# EAGLE board ARTIC_R2_Module_Breakout-Panel (EAGLE 9.6.2), part 1 of 2
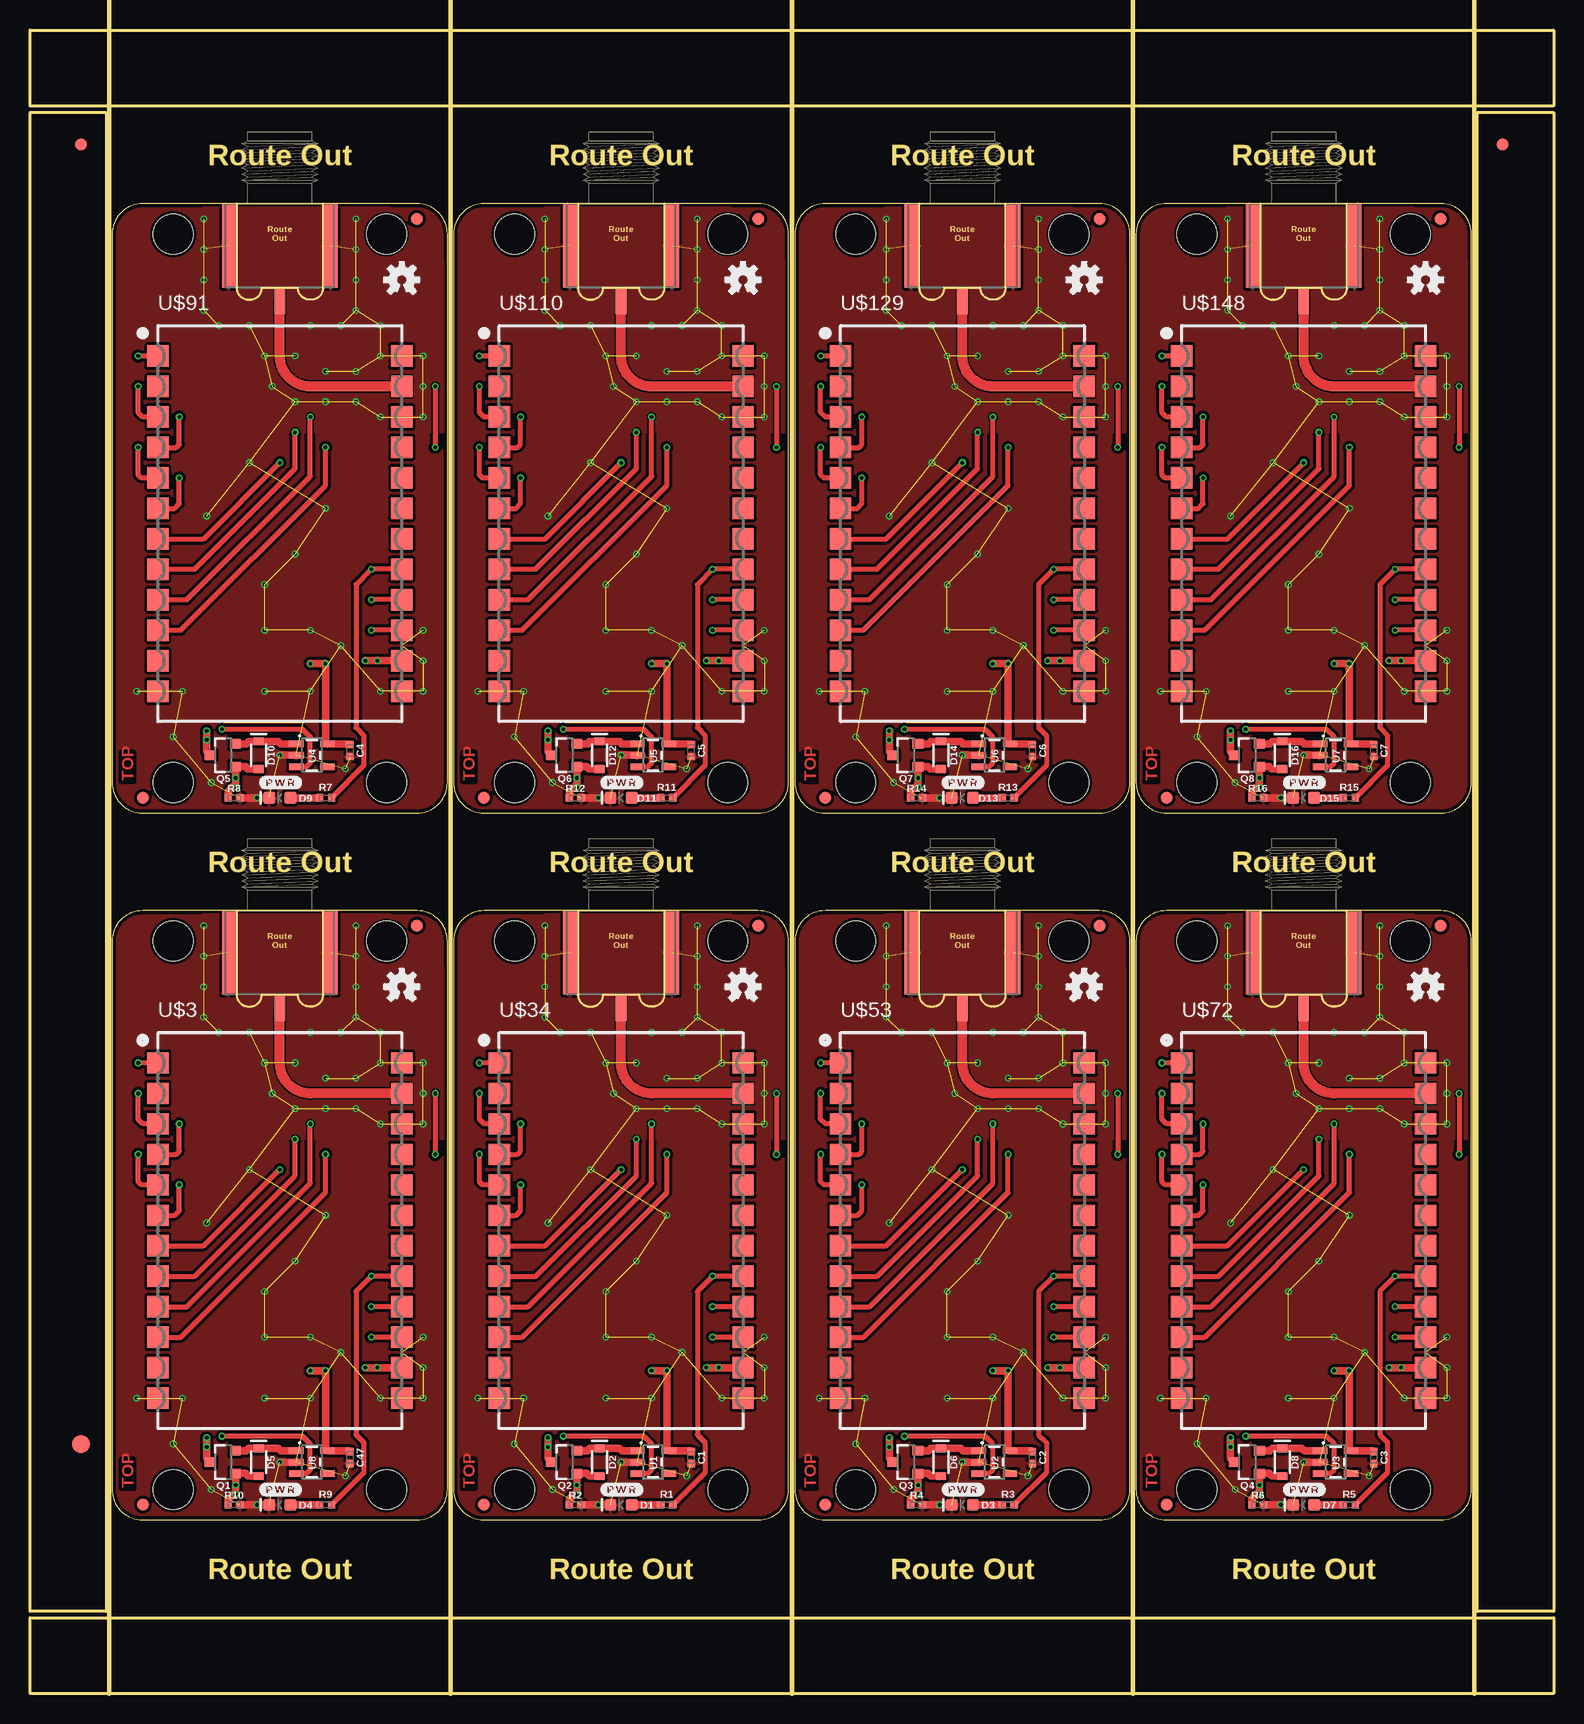
[diagram p0: board, top side]
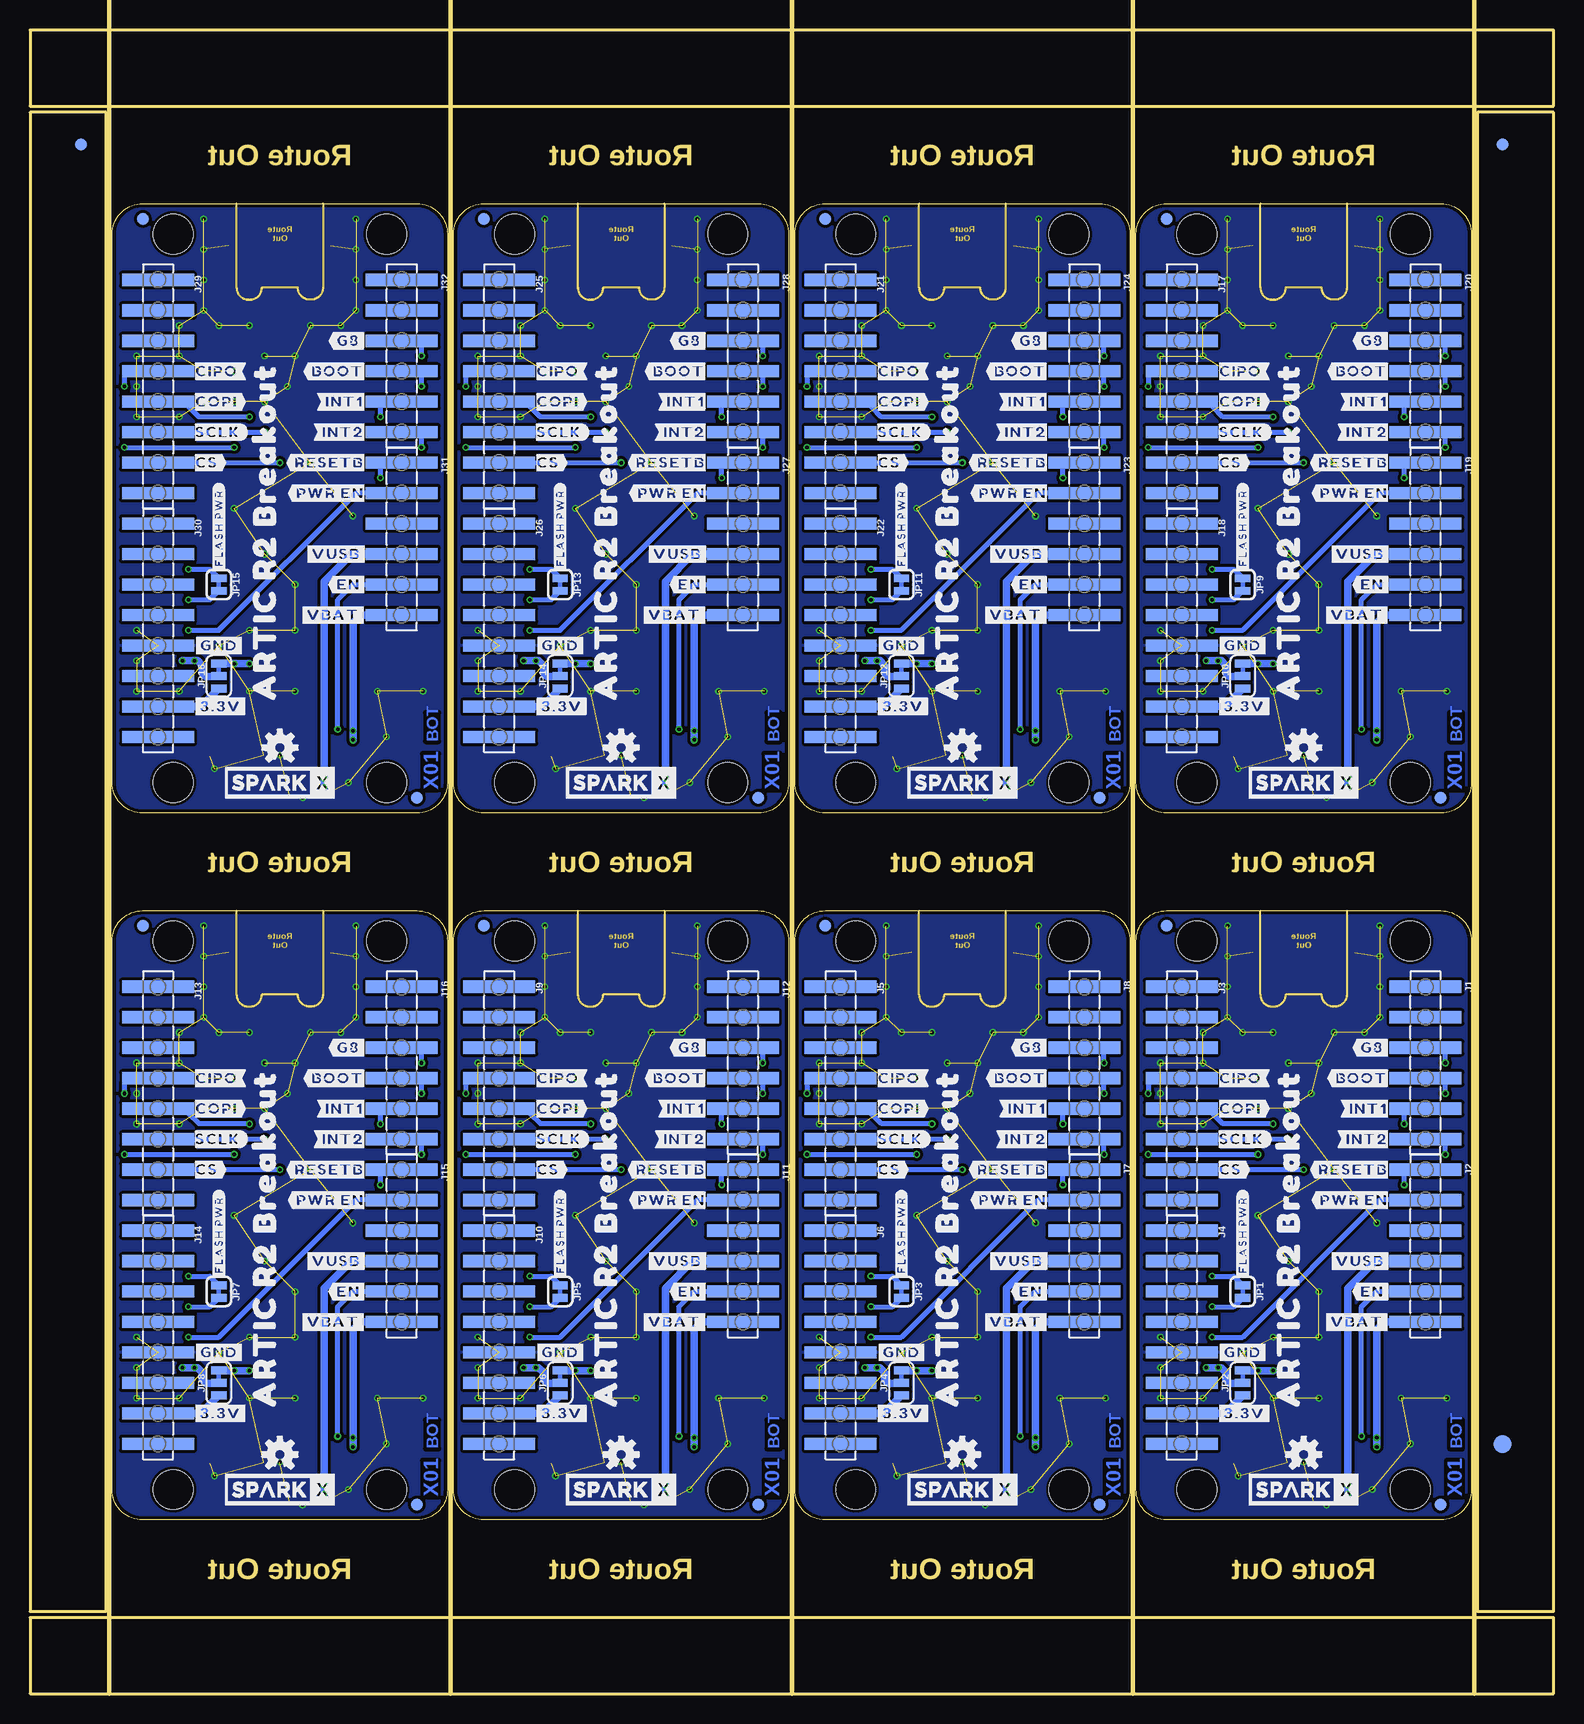
[diagram p1: board, bottom side, seen from below]

Size 127 x 138.68 mm. Coordinates in mm from the lower left corner, seen from the top.
Outline: 6.86,62.74 6.86,17.02 arc90 9.4,14.48 32.26,14.48 arc90 34.8,17.02 34.8,62.74 arc90 32.26,65.28 9.4,65.28 arc90 6.86,62.74
Outline: 35.31,62.74 35.31,17.02 arc90 37.85,14.48 60.71,14.48 arc90 63.25,17.02 63.25,62.74 arc90 60.71,65.28 37.85,65.28 arc90 35.31,62.74
Outline: 63.75,62.74 63.75,17.02 arc90 66.29,14.48 89.15,14.48 arc90 91.69,17.02 91.69,62.74 arc90 89.15,65.28 66.29,65.28 arc90 63.75,62.74
Outline: 92.2,62.74 92.2,17.02 arc90 94.74,14.48 117.6,14.48 arc90 120.14,17.02 120.14,62.74 arc90 117.6,65.28 94.74,65.28 arc90 92.2,62.74
Outline: 6.86,121.67 6.86,75.95 arc90 9.4,73.41 32.26,73.41 arc90 34.8,75.95 34.8,121.67 arc90 32.26,124.21 9.4,124.21 arc90 6.86,121.67
Outline: 35.31,121.67 35.31,75.95 arc90 37.85,73.41 60.71,73.41 arc90 63.25,75.95 63.25,121.67 arc90 60.71,124.21 37.85,124.21 arc90 35.31,121.67
Outline: 63.75,121.67 63.75,75.95 arc90 66.29,73.41 89.15,73.41 arc90 91.69,75.95 91.69,121.67 arc90 89.15,124.21 66.29,124.21 arc90 63.75,121.67
Outline: 92.2,121.67 92.2,75.95 arc90 94.74,73.41 117.6,73.41 arc90 120.14,75.95 120.14,121.67 arc90 117.6,124.21 94.74,124.21 arc90 92.2,121.67
Outline: 0,6.35 127,6.35 127,0 0,0 0,6.35
Outline: 120.65,131.83 127,131.83 127,6.86 120.65,6.86 120.65,131.83
Outline: 0,138.68 127,138.68 127,132.33 0,132.33 0,138.68
Outline: 0,131.83 6.35,131.83 6.35,6.86 0,6.86 0,131.83
Copper layers (1+2*15+16): Top 0.035mm / dielectric 0.2mm / Route2 0.0175mm / dielectric 1.065mm / Route15 0.0175mm / dielectric 0.2mm / Bottom 0.035mm
Design rules "ARTIC_R2_Module_Breakout": minimum track width 5mil, minimum drill 0.2mm, track to track 5mil, track to pad 0.2mm, pad to pad 5mil, via to via 0.2mm, smd to smd 0mil, copper to edge 0.2mm, drill to drill 10mil, minimum pad ring 0.13mm, minimum via ring 0.13mm, stop-mask expansion 0.05mm, vias tented up to drill 25mil, thermal gap 10mil
Holes 3.3 mm at 11.94,17.02 29.72,17.02 29.72,62.74 11.94,62.74 40.39,17.02 58.17,17.02 58.17,62.74 40.39,62.74 68.83,17.02 86.61,17.02 86.61,62.74 68.83,62.74 97.28,17.02 115.06,17.02 115.06,62.74 97.28,62.74 11.94,75.95 29.72,75.95 29.72,121.67 11.94,121.67 40.39,75.95 58.17,75.95 58.17,121.67 40.39,121.67 68.83,75.95 86.61,75.95 86.61,121.67 68.83,121.67 97.28,75.95 115.06,75.95 115.06,121.67 97.28,121.67
Milling: 5 lines

## Footprints (pad centres in the part's own frame; a part is rotated, then mirrored left to right if it is on the bottom)
0402-TIGHT = smd 0.6 x 0.6: 1 -0.5,0; 2 0.5,0
LED-0603 = smd 1 x 1: A -0.877,0; C 0.877,0
SOD-323 = smd 0.63 x 0.83: A 1.15,0; C -1.15,0
SMA-EDGE-SMD = smd 1.15 x 7: GND@0 -4.25,-3.5; GND@1 4.25,-3.5 | smd 0.9 x 2.2: SIG 0,-8.1
FIDUCIAL-1X2 = smd 1 x 1: 1 0,0
FIDUCIAL-1.5X3 = smd 1.5 x 1.5: 1 0,0
1X06_SMD_MALE = smd 1.02 x 6: 1 0,0; 2 2.54,0; 3 5.08,0; 4 7.62,0; 5 10.16,0; 6 12.7,0
1X08_SMD_MALE = smd 1.02 x 6: 1 0,0; 2 2.54,0; 3 5.08,0; 4 7.62,0; 5 10.16,0; 6 12.7,0; 7 15.24,0; 8 17.78,0
SMT-JUMPER_2_NC_TRACE_SILK = smd 0.66 x 1.27: 1 -0.521,0; 2 0.521,0
SMT-JUMPER_3_1-NC_TRACE_SILK = smd 0.66 x 1.27: 1 -1.041,0; 2 0,0; 3 1.041,0
SOT23-3 = smd 0.8 x 0.9: 1 -0.95,-1; 2 0.95,-1; 3 0,1.1
SOT23-5 = smd 0.55 x 1.2: 1 -0.95,-1.3; 2 0,-1.3; 3 0.95,-1.3; 4 0.95,1.3; 5 -0.95,1.3
ARTIC_R2_MODULE = smd 1.778 x 1.778: 1 -10.16,13.97; 2 -10.16,11.43; 3 -10.16,8.89; 4 -10.16,6.35; 5 -10.16,3.81; 6 -10.16,1.27; 7 -10.16,-1.27; 8 -10.16,-3.81; 9 -10.16,-6.35; 10 -10.16,-8.89; 11 -10.16,-11.43; 12 -10.16,-13.97; 13 10.16,-13.97; 14 10.16,-11.43; 15 10.16,-8.89; 16 10.16,-6.35; 17 10.16,-3.81; 18 10.16,-1.27; 19 10.16,1.27; 20 10.16,3.81; 21 10.16,6.35; 22 10.16,8.89; 23 10.16,11.43; 24 10.16,13.97

## Placement (x,y rotation side)
C1  2.2uF  [0402-TIGHT]  55.12,19.68 270 top
C2  2.2uF  [0402-TIGHT]  83.57,19.68 270 top
C3  2.2uF  [0402-TIGHT]  112.01,19.68 270 top
C4  2.2uF  [0402-TIGHT]  26.67,78.61 270 top
C5  2.2uF  [0402-TIGHT]  55.12,78.61 270 top
C6  2.2uF  [0402-TIGHT]  83.57,78.61 270 top
C7  2.2uF  [0402-TIGHT]  112.01,78.61 270 top
C47  2.2uF  [0402-TIGHT]  26.67,19.68 270 top
D1  RED  [LED-0603]  49.28,15.75 180 top
D2  1A/23V/620mV  [SOD-323]  47.5,19.3 270 top
D3  RED  [LED-0603]  77.72,15.75 180 top
D4  RED  [LED-0603]  20.83,15.75 180 top
D5  1A/23V/620mV  [SOD-323]  19.05,19.3 270 top
D6  1A/23V/620mV  [SOD-323]  75.95,19.3 270 top
D7  RED  [LED-0603]  106.17,15.75 180 top
D8  1A/23V/620mV  [SOD-323]  104.39,19.3 270 top
D9  RED  [LED-0603]  20.83,74.68 180 top
D10  1A/23V/620mV  [SOD-323]  19.05,78.23 270 top
D11  RED  [LED-0603]  49.28,74.68 180 top
D12  1A/23V/620mV  [SOD-323]  47.5,78.23 270 top
D13  RED  [LED-0603]  77.72,74.68 180 top
D14  1A/23V/620mV  [SOD-323]  75.95,78.23 270 top
D15  RED  [LED-0603]  106.17,74.68 180 top
D16  1A/23V/620mV  [SOD-323]  104.39,78.23 270 top
E1  ANTENNA-SMA-GROUNDEDEDGE_SMA_SMD  [SMA-EDGE-SMD]  20.83,65.28 0 top
E2  ANTENNA-SMA-GROUNDEDEDGE_SMA_SMD  [SMA-EDGE-SMD]  49.28,65.28 0 top
E3  ANTENNA-SMA-GROUNDEDEDGE_SMA_SMD  [SMA-EDGE-SMD]  77.72,65.28 0 top
E4  ANTENNA-SMA-GROUNDEDEDGE_SMA_SMD  [SMA-EDGE-SMD]  106.17,65.28 0 top
E5  ANTENNA-SMA-GROUNDEDEDGE_SMA_SMD  [SMA-EDGE-SMD]  20.83,124.21 0 top
E6  ANTENNA-SMA-GROUNDEDEDGE_SMA_SMD  [SMA-EDGE-SMD]  49.28,124.21 0 top
E7  ANTENNA-SMA-GROUNDEDEDGE_SMA_SMD  [SMA-EDGE-SMD]  77.72,124.21 0 top
E8  ANTENNA-SMA-GROUNDEDEDGE_SMA_SMD  [SMA-EDGE-SMD]  106.17,124.21 0 top
E$1  [FIDUCIAL-1X2]  4.23,129.16 0 top
E$2  [FIDUCIAL-1X2]  4.23,129.16 0 bottom
E$3  [FIDUCIAL-1X2]  122.77,129.16 0 top
E$4  [FIDUCIAL-1X2]  122.77,129.16 0 bottom
E$5  [FIDUCIAL-1.5X3]  4.23,20.83 0 top
E$6  [FIDUCIAL-1.5X3]  4.23,20.83 0 bottom
FD1  FIDUCIAL1X2  [FIDUCIAL-1X2]  32.26,64.01 0 top
FD2  FIDUCIAL1X2  [FIDUCIAL-1X2]  32.26,64.01 0 bottom
FD3  FIDUCIAL1X2  [FIDUCIAL-1X2]  9.4,15.75 0 top
FD4  FIDUCIAL1X2  [FIDUCIAL-1X2]  9.4,15.75 0 bottom
FD5  FIDUCIAL1X2  [FIDUCIAL-1X2]  60.71,64.01 0 top
FD6  FIDUCIAL1X2  [FIDUCIAL-1X2]  60.71,64.01 0 bottom
FD7  FIDUCIAL1X2  [FIDUCIAL-1X2]  37.85,15.75 0 top
FD8  FIDUCIAL1X2  [FIDUCIAL-1X2]  37.85,15.75 0 bottom
FD9  FIDUCIAL1X2  [FIDUCIAL-1X2]  89.15,64.01 0 top
FD10  FIDUCIAL1X2  [FIDUCIAL-1X2]  89.15,64.01 0 bottom
FD11  FIDUCIAL1X2  [FIDUCIAL-1X2]  66.29,15.75 0 top
FD12  FIDUCIAL1X2  [FIDUCIAL-1X2]  66.29,15.75 0 bottom
FD13  FIDUCIAL1X2  [FIDUCIAL-1X2]  117.6,64.01 0 top
FD14  FIDUCIAL1X2  [FIDUCIAL-1X2]  117.6,64.01 0 bottom
FD15  FIDUCIAL1X2  [FIDUCIAL-1X2]  94.74,15.75 0 top
FD16  FIDUCIAL1X2  [FIDUCIAL-1X2]  94.74,15.75 0 bottom
FD17  FIDUCIAL1X2  [FIDUCIAL-1X2]  32.26,122.94 0 top
FD18  FIDUCIAL1X2  [FIDUCIAL-1X2]  32.26,122.94 0 bottom
FD19  FIDUCIAL1X2  [FIDUCIAL-1X2]  9.4,74.68 0 top
FD20  FIDUCIAL1X2  [FIDUCIAL-1X2]  9.4,74.68 0 bottom
FD21  FIDUCIAL1X2  [FIDUCIAL-1X2]  60.71,122.94 0 top
FD22  FIDUCIAL1X2  [FIDUCIAL-1X2]  60.71,122.94 0 bottom
FD23  FIDUCIAL1X2  [FIDUCIAL-1X2]  37.85,74.68 0 top
FD24  FIDUCIAL1X2  [FIDUCIAL-1X2]  37.85,74.68 0 bottom
FD25  FIDUCIAL1X2  [FIDUCIAL-1X2]  89.15,122.94 0 top
FD26  FIDUCIAL1X2  [FIDUCIAL-1X2]  89.15,122.94 0 bottom
FD27  FIDUCIAL1X2  [FIDUCIAL-1X2]  66.29,74.68 0 top
FD28  FIDUCIAL1X2  [FIDUCIAL-1X2]  66.29,74.68 0 bottom
FD29  FIDUCIAL1X2  [FIDUCIAL-1X2]  117.6,122.94 0 top
FD30  FIDUCIAL1X2  [FIDUCIAL-1X2]  117.6,122.94 0 bottom
FD31  FIDUCIAL1X2  [FIDUCIAL-1X2]  94.74,74.68 0 top
FD32  FIDUCIAL1X2  [FIDUCIAL-1X2]  94.74,74.68 0 bottom
J1  [1X06_SMD_MALE]  10.67,58.93 270 bottom
J2  [1X06_SMD_MALE]  10.67,43.69 270 bottom
J3  [1X08_SMD_MALE]  30.99,58.93 270 bottom
J4  [1X08_SMD_MALE]  30.99,38.61 270 bottom
J5  [1X08_SMD_MALE]  59.44,58.93 270 bottom
J6  [1X08_SMD_MALE]  59.44,38.61 270 bottom
J7  [1X06_SMD_MALE]  39.12,43.69 270 bottom
J8  [1X06_SMD_MALE]  39.12,58.93 270 bottom
J9  [1X08_SMD_MALE]  87.88,58.93 270 bottom
J10  [1X08_SMD_MALE]  87.88,38.61 270 bottom
J11  [1X06_SMD_MALE]  67.56,43.69 270 bottom
J12  [1X06_SMD_MALE]  67.56,58.93 270 bottom
J13  [1X08_SMD_MALE]  116.33,58.93 270 bottom
J14  [1X08_SMD_MALE]  116.33,38.61 270 bottom
J15  [1X06_SMD_MALE]  96.01,43.69 270 bottom
J16  [1X06_SMD_MALE]  96.01,58.93 270 bottom
J17  [1X08_SMD_MALE]  30.99,117.86 270 bottom
J18  [1X08_SMD_MALE]  30.99,97.54 270 bottom
J19  [1X06_SMD_MALE]  10.67,102.62 270 bottom
J20  [1X06_SMD_MALE]  10.67,117.86 270 bottom
J21  [1X08_SMD_MALE]  59.44,117.86 270 bottom
J22  [1X08_SMD_MALE]  59.44,97.54 270 bottom
J23  [1X06_SMD_MALE]  39.12,102.62 270 bottom
J24  [1X06_SMD_MALE]  39.12,117.86 270 bottom
J25  [1X08_SMD_MALE]  87.88,117.86 270 bottom
J26  [1X08_SMD_MALE]  87.88,97.54 270 bottom
J27  [1X06_SMD_MALE]  67.56,102.62 270 bottom
J28  [1X06_SMD_MALE]  67.56,117.86 270 bottom
J29  [1X08_SMD_MALE]  116.33,117.86 270 bottom
J30  [1X08_SMD_MALE]  116.33,97.54 270 bottom
J31  [1X06_SMD_MALE]  96.01,102.62 270 bottom
J32  [1X06_SMD_MALE]  96.01,117.86 270 bottom
JP1  JUMPER-SMT_2_NC_TRACE_SILK  [SMT-JUMPER_2_NC_TRACE_SILK]  25.91,33.53 270 bottom
JP2  JUMPER-SMT_3_1-NC_TRACE_SILK  [SMT-JUMPER_3_1-NC_TRACE_SILK]  25.91,25.91 90 bottom
JP3  JUMPER-SMT_2_NC_TRACE_SILK  [SMT-JUMPER_2_NC_TRACE_SILK]  54.36,33.53 270 bottom
JP4  JUMPER-SMT_3_1-NC_TRACE_SILK  [SMT-JUMPER_3_1-NC_TRACE_SILK]  54.36,25.91 90 bottom
JP5  JUMPER-SMT_2_NC_TRACE_SILK  [SMT-JUMPER_2_NC_TRACE_SILK]  82.8,33.53 270 bottom
JP6  JUMPER-SMT_3_1-NC_TRACE_SILK  [SMT-JUMPER_3_1-NC_TRACE_SILK]  82.8,25.91 90 bottom
JP7  JUMPER-SMT_2_NC_TRACE_SILK  [SMT-JUMPER_2_NC_TRACE_SILK]  111.25,33.53 270 bottom
JP8  JUMPER-SMT_3_1-NC_TRACE_SILK  [SMT-JUMPER_3_1-NC_TRACE_SILK]  111.25,25.91 90 bottom
JP9  JUMPER-SMT_2_NC_TRACE_SILK  [SMT-JUMPER_2_NC_TRACE_SILK]  25.91,92.46 270 bottom
JP10  JUMPER-SMT_3_1-NC_TRACE_SILK  [SMT-JUMPER_3_1-NC_TRACE_SILK]  25.91,84.84 90 bottom
JP11  JUMPER-SMT_2_NC_TRACE_SILK  [SMT-JUMPER_2_NC_TRACE_SILK]  54.36,92.46 270 bottom
JP12  JUMPER-SMT_3_1-NC_TRACE_SILK  [SMT-JUMPER_3_1-NC_TRACE_SILK]  54.36,84.84 90 bottom
JP13  JUMPER-SMT_2_NC_TRACE_SILK  [SMT-JUMPER_2_NC_TRACE_SILK]  82.8,92.46 270 bottom
JP14  JUMPER-SMT_3_1-NC_TRACE_SILK  [SMT-JUMPER_3_1-NC_TRACE_SILK]  82.8,84.84 90 bottom
JP15  JUMPER-SMT_2_NC_TRACE_SILK  [SMT-JUMPER_2_NC_TRACE_SILK]  111.25,92.46 270 bottom
JP16  JUMPER-SMT_3_1-NC_TRACE_SILK  [SMT-JUMPER_3_1-NC_TRACE_SILK]  111.25,84.84 90 bottom
LOGO1  OSHW-LOGOS  [OSHW-LOGO-S]  59.44,58.93 0 top
LOGO2  OSHW-LOGOS  [OSHW-LOGO-S]  30.99,58.93 0 top
LOGO3  OSHW-LOGOS  [OSHW-LOGO-S]  20.83,19.94 0 bottom
LOGO4  OSHW-LOGOS  [OSHW-LOGO-S]  49.28,19.94 0 bottom
LOGO5  OSHW-LOGOS  [OSHW-LOGO-S]  87.88,58.93 0 top
LOGO6  OSHW-LOGOS  [OSHW-LOGO-S]  77.72,19.94 0 bottom
LOGO7  OSHW-LOGOS  [OSHW-LOGO-S]  116.33,58.93 0 top
LOGO8  OSHW-LOGOS  [OSHW-LOGO-S]  106.17,19.94 0 bottom
LOGO9  OSHW-LOGOS  [OSHW-LOGO-S]  30.99,117.86 0 top
LOGO10  OSHW-LOGOS  [OSHW-LOGO-S]  20.83,78.87 0 bottom
LOGO11  OSHW-LOGOS  [OSHW-LOGO-S]  59.44,117.86 0 top
LOGO12  OSHW-LOGOS  [OSHW-LOGO-S]  49.28,78.87 0 bottom
LOGO13  OSHW-LOGOS  [OSHW-LOGO-S]  87.88,117.86 0 top
LOGO14  OSHW-LOGOS  [OSHW-LOGO-S]  77.72,78.87 0 bottom
LOGO15  OSHW-LOGOS  [OSHW-LOGO-S]  116.33,117.86 0 top
LOGO16  OSHW-LOGOS  [OSHW-LOGO-S]  106.17,78.87 0 bottom
Q1  3.1A/30V/105mΩ  [SOT23-3]  16.13,19.3 90 top
Q2  3.1A/30V/105mΩ  [SOT23-3]  44.58,19.3 90 top
Q3  3.1A/30V/105mΩ  [SOT23-3]  73.03,19.3 90 top
Q4  3.1A/30V/105mΩ  [SOT23-3]  101.47,19.3 90 top
Q5  3.1A/30V/105mΩ  [SOT23-3]  16.13,78.23 90 top
Q6  3.1A/30V/105mΩ  [SOT23-3]  44.58,78.23 90 top
Q7  3.1A/30V/105mΩ  [SOT23-3]  73.03,78.23 90 top
Q8  3.1A/30V/105mΩ  [SOT23-3]  101.47,78.23 90 top
R1  1k  [0402-TIGHT]  53.09,15.75 0 top
R2  100k  [0402-TIGHT]  45.47,15.75 180 top
R3  1k  [0402-TIGHT]  81.53,15.75 0 top
R4  100k  [0402-TIGHT]  73.91,15.75 180 top
R5  1k  [0402-TIGHT]  109.98,15.75 0 top
R6  100k  [0402-TIGHT]  102.36,15.75 180 top
R7  1k  [0402-TIGHT]  24.64,74.68 0 top
R8  100k  [0402-TIGHT]  17.02,74.68 180 top
R9  1k  [0402-TIGHT]  24.64,15.75 0 top
R10  100k  [0402-TIGHT]  17.02,15.75 180 top
R11  1k  [0402-TIGHT]  53.09,74.68 0 top
R12  100k  [0402-TIGHT]  45.47,74.68 180 top
R13  1k  [0402-TIGHT]  81.53,74.68 0 top
R14  100k  [0402-TIGHT]  73.91,74.68 180 top
R15  1k  [0402-TIGHT]  109.98,74.68 0 top
R16  100k  [0402-TIGHT]  102.36,74.68 180 top
SPARKX1  SPARKX-LOGO4  [SPARKX-MEDIUM]  49.28,17.02 0 bottom
SPARKX2  SPARKX-LOGO4  [SPARKX-MEDIUM]  20.83,17.02 0 bottom
SPARKX3  SPARKX-LOGO4  [SPARKX-MEDIUM]  77.72,17.02 0 bottom
SPARKX4  SPARKX-LOGO4  [SPARKX-MEDIUM]  106.17,17.02 0 bottom
SPARKX5  SPARKX-LOGO4  [SPARKX-MEDIUM]  20.83,75.95 0 bottom
SPARKX6  SPARKX-LOGO4  [SPARKX-MEDIUM]  49.28,75.95 0 bottom
SPARKX7  SPARKX-LOGO4  [SPARKX-MEDIUM]  77.72,75.95 0 bottom
SPARKX8  SPARKX-LOGO4  [SPARKX-MEDIUM]  106.17,75.95 0 bottom
U1  3.3V  [SOT23-5]  51.94,19.3 270 top
U2  3.3V  [SOT23-5]  80.39,19.3 270 top
U3  3.3V  [SOT23-5]  108.84,19.3 270 top
U4  3.3V  [SOT23-5]  23.5,78.23 270 top
U5  3.3V  [SOT23-5]  51.94,78.23 270 top
U6  3.3V  [SOT23-5]  80.39,78.23 270 top
U7  3.3V  [SOT23-5]  108.84,78.23 270 top
U8  3.3V  [SOT23-5]  23.5,19.3 270 top
U$1  [#GND#0]  25.91,28.45 0 bottom
U$2  [#3#3V#0]  25.78,23.37 0 bottom
U$3  ARTIC_R2_MODULE  [ARTIC_R2_MODULE]  20.83,38.61 0 top
U$4  [#FLASH_PWR#0]  25.91,38.23 90 bottom
U$5  [#VBAT#0]  16.38,30.99 0 bottom
U$6  [#G8#0]  15.11,53.85 0 bottom
U$7  [#EN#0]  15.11,33.53 0 bottom
U$8  [#VUSB#0]  16.13,36.07 0 bottom
U$9  [CIPO#0]  26.1,51.31 0 bottom
U$10  [CIPO#0]  54.55,51.31 0 bottom
U$11  [COPI#0]  54.55,48.77 0 bottom
U$12  [COPI#0]  26.1,48.77 0 bottom
U$13  [SCLK#0]  54.48,46.23 0 bottom
U$14  [SCLK#0]  26.04,46.23 0 bottom
U$15  [CS#0]  55.37,43.69 0 bottom
U$16  [CS#0]  26.92,43.69 0 bottom
U$17  [#BOOT0]  44.45,51.31 0 bottom
U$18  [#RESETB0]  16.7,43.69 0 bottom
U$19  [#PWR_EN0]  16.64,41.15 0 bottom
U$20  [#RESETB0]  45.15,43.69 0 bottom
U$21  [#PWR_EN0]  45.08,41.15 0 bottom
U$22  [#INT20]  44.01,46.23 0 bottom
U$23  [#INT10]  43.88,48.77 0 bottom
U$24  [#BOOT0]  16,51.31 0 bottom
U$25  [#INT10]  15.43,48.77 0 bottom
U$26  [#INT20]  15.56,46.23 0 bottom
U$27  [#PWR#0]  49.34,17.02 0 top
U$28  [#PWR#0]  20.89,17.02 0 top
U$29  [ARTIC_R2_BREAKOUT0]  22.1,37.97 90 bottom
U$30  [ARTIC_R2_BREAKOUT0]  50.55,37.97 90 bottom
U$31  [#G8#0]  43.56,53.85 0 bottom
U$32  [#GND#0]  54.36,28.45 0 bottom
U$33  [#3#3V#0]  54.23,23.37 0 bottom
U$34  ARTIC_R2_MODULE  [ARTIC_R2_MODULE]  49.28,38.61 0 top
U$35  [#VBAT#0]  44.83,30.99 0 bottom
U$36  [#EN#0]  43.56,33.53 0 bottom
U$37  [#VUSB#0]  44.58,36.07 0 bottom
U$38  [#FLASH_PWR#0]  54.36,38.23 90 bottom
U$39  [CIPO#0]  82.99,51.31 0 bottom
U$40  [COPI#0]  82.99,48.77 0 bottom
U$41  [SCLK#0]  82.93,46.23 0 bottom
U$42  [CS#0]  83.82,43.69 0 bottom
U$43  [#BOOT0]  72.9,51.31 0 bottom
U$44  [#RESETB0]  73.6,43.69 0 bottom
U$45  [#PWR_EN0]  73.53,41.15 0 bottom
U$46  [#INT20]  72.45,46.23 0 bottom
U$47  [#INT10]  72.33,48.77 0 bottom
U$48  [#PWR#0]  77.79,17.02 0 top
U$49  [ARTIC_R2_BREAKOUT0]  78.99,37.97 90 bottom
U$50  [#G8#0]  72.01,53.85 0 bottom
U$51  [#GND#0]  82.8,28.45 0 bottom
U$52  [#3#3V#0]  82.68,23.37 0 bottom
U$53  ARTIC_R2_MODULE  [ARTIC_R2_MODULE]  77.72,38.61 0 top
U$54  [#VBAT#0]  73.28,30.99 0 bottom
U$55  [#EN#0]  72.01,33.53 0 bottom
U$56  [#VUSB#0]  73.03,36.07 0 bottom
U$57  [#FLASH_PWR#0]  82.8,38.23 90 bottom
U$58  [CIPO#0]  111.44,51.31 0 bottom
U$59  [COPI#0]  111.44,48.77 0 bottom
U$60  [SCLK#0]  111.38,46.23 0 bottom
U$61  [CS#0]  112.27,43.69 0 bottom
U$62  [#BOOT0]  101.35,51.31 0 bottom
U$63  [#RESETB0]  102.04,43.69 0 bottom
U$64  [#PWR_EN0]  101.98,41.15 0 bottom
U$65  [#INT20]  100.9,46.23 0 bottom
U$66  [#INT10]  100.77,48.77 0 bottom
U$67  [#PWR#0]  106.24,17.02 0 top
U$68  [ARTIC_R2_BREAKOUT0]  107.44,37.97 90 bottom
U$69  [#G8#0]  100.46,53.85 0 bottom
U$70  [#GND#0]  111.25,28.45 0 bottom
U$71  [#3#3V#0]  111.12,23.37 0 bottom
U$72  ARTIC_R2_MODULE  [ARTIC_R2_MODULE]  106.17,38.61 0 top
U$73  [#VBAT#0]  101.73,30.99 0 bottom
U$74  [#EN#0]  100.46,33.53 0 bottom
U$75  [#VUSB#0]  101.47,36.07 0 bottom
U$76  [#FLASH_PWR#0]  111.25,38.23 90 bottom
U$77  [CIPO#0]  26.1,110.24 0 bottom
U$78  [COPI#0]  26.1,107.7 0 bottom
U$79  [SCLK#0]  26.04,105.16 0 bottom
U$80  [CS#0]  26.92,102.62 0 bottom
U$81  [#BOOT0]  16,110.24 0 bottom
U$82  [#RESETB0]  16.7,102.62 0 bottom
U$83  [#PWR_EN0]  16.64,100.08 0 bottom
U$84  [#INT20]  15.56,105.16 0 bottom
U$85  [#INT10]  15.43,107.7 0 bottom
U$86  [#PWR#0]  20.89,75.95 0 top
U$87  [ARTIC_R2_BREAKOUT0]  22.1,96.9 90 bottom
U$88  [#G8#0]  15.11,112.78 0 bottom
U$89  [#GND#0]  25.91,87.38 0 bottom
U$90  [#3#3V#0]  25.78,82.3 0 bottom
U$91  ARTIC_R2_MODULE  [ARTIC_R2_MODULE]  20.83,97.54 0 top
U$92  [#VBAT#0]  16.38,89.92 0 bottom
U$93  [#EN#0]  15.11,92.46 0 bottom
U$94  [#VUSB#0]  16.13,95 0 bottom
U$95  [#FLASH_PWR#0]  25.91,97.16 90 bottom
U$96  [CIPO#0]  54.55,110.24 0 bottom
U$97  [COPI#0]  54.55,107.7 0 bottom
U$98  [SCLK#0]  54.48,105.16 0 bottom
U$99  [CS#0]  55.37,102.62 0 bottom
U$100  [#BOOT0]  44.45,110.24 0 bottom
U$101  [#RESETB0]  45.15,102.62 0 bottom
U$102  [#PWR_EN0]  45.08,100.08 0 bottom
U$103  [#INT20]  44.01,105.16 0 bottom
U$104  [#INT10]  43.88,107.7 0 bottom
U$105  [#PWR#0]  49.34,75.95 0 top
U$106  [ARTIC_R2_BREAKOUT0]  50.55,96.9 90 bottom
U$107  [#G8#0]  43.56,112.78 0 bottom
U$108  [#GND#0]  54.36,87.38 0 bottom
U$109  [#3#3V#0]  54.23,82.3 0 bottom
U$110  ARTIC_R2_MODULE  [ARTIC_R2_MODULE]  49.28,97.54 0 top
U$111  [#VBAT#0]  44.83,89.92 0 bottom
U$112  [#EN#0]  43.56,92.46 0 bottom
U$113  [#VUSB#0]  44.58,95 0 bottom
U$114  [#FLASH_PWR#0]  54.36,97.16 90 bottom
U$115  [CIPO#0]  82.99,110.24 0 bottom
U$116  [COPI#0]  82.99,107.7 0 bottom
U$117  [SCLK#0]  82.93,105.16 0 bottom
U$118  [CS#0]  83.82,102.62 0 bottom
U$119  [#BOOT0]  72.9,110.24 0 bottom
U$120  [#RESETB0]  73.6,102.62 0 bottom
U$121  [#PWR_EN0]  73.53,100.08 0 bottom
U$122  [#INT20]  72.45,105.16 0 bottom
U$123  [#INT10]  72.33,107.7 0 bottom
U$124  [#PWR#0]  77.79,75.95 0 top
U$125  [ARTIC_R2_BREAKOUT0]  78.99,96.9 90 bottom
U$126  [#G8#0]  72.01,112.78 0 bottom
U$127  [#GND#0]  82.8,87.38 0 bottom
U$128  [#3#3V#0]  82.68,82.3 0 bottom
U$129  ARTIC_R2_MODULE  [ARTIC_R2_MODULE]  77.72,97.54 0 top
U$130  [#VBAT#0]  73.28,89.92 0 bottom
U$131  [#EN#0]  72.01,92.46 0 bottom
U$132  [#VUSB#0]  73.03,95 0 bottom
U$133  [#FLASH_PWR#0]  82.8,97.16 90 bottom
U$134  [CIPO#0]  111.44,110.24 0 bottom
U$135  [COPI#0]  111.44,107.7 0 bottom
U$136  [SCLK#0]  111.38,105.16 0 bottom
U$137  [CS#0]  112.27,102.62 0 bottom
U$138  [#BOOT0]  101.35,110.24 0 bottom
U$139  [#RESETB0]  102.04,102.62 0 bottom
U$140  [#PWR_EN0]  101.98,100.08 0 bottom
U$141  [#INT20]  100.9,105.16 0 bottom
U$142  [#INT10]  100.77,107.7 0 bottom
U$143  [#PWR#0]  106.24,75.95 0 top
U$144  [ARTIC_R2_BREAKOUT0]  107.44,96.9 90 bottom
U$145  [#G8#0]  100.46,112.78 0 bottom
U$146  [#GND#0]  111.25,87.38 0 bottom
U$147  [#3#3V#0]  111.12,82.3 0 bottom
U$148  ARTIC_R2_MODULE  [ARTIC_R2_MODULE]  106.17,97.54 0 top
U$149  [#VBAT#0]  101.73,89.92 0 bottom
U$150  [#EN#0]  100.46,92.46 0 bottom
U$151  [#VUSB#0]  101.47,95 0 bottom
U$152  [#FLASH_PWR#0]  111.25,97.16 90 bottom

## Library data of the parts
C1-C7 C47 = SparkFun-Capacitors; PROD_ID: CAP-14232
D1 D3 D4 D7 D9 D11 D13 D15 = SparkFun-LED; PROD_ID: DIO-00819
D2 D5 D6 D8 D10 D12 D14 D16 = SparkFun-DiscreteSemi; PROD_ID: DIO-11623
E1-E8 = SparkFun-RF; PROD_ID: CONN-15100
E$1-E$4 FD1-FD32 LOGO1-LOGO16 = SparkFun-Aesthetics
E$5 E$6 = SparkFun-Retired
J1 J2 J7 J8 J11 J12 J15 J16 J19 J20 J23 J24 J27 J28 J31 J32 = Connectors; PROD_ID: PRT-11540
J3-J6 J9 J10 J13 J14 J17 J18 J21 J22 J25 J26 J29 J30 = Connectors; PROD_ID: PRT-11541
JP1-JP16 = SparkFun-Jumpers
Q1-Q8 = SparkFun-DiscreteSemi; PROD_ID: TRANS-11308
R1 R3 R5 R7 R9 R11 R13 R15 = SparkFun-Resistors; PROD_ID: RES-14342
R2 R4 R6 R8 R10 R12 R14 R16 = SparkFun-Resistors; PROD_ID: RES-13495
SPARKX1-SPARKX8 = SparkX
U1-U8 = SparkFun-IC-Power; PROD_ID: VREG-12457
U$1 U$2 U$4-U$33 U$35-U$52 U$54-U$71 U$73-U$90 U$92-U$109 U$111-U$128 U$130-U$147 U$149-U$152 = output
U$3 U$34 U$53 U$72 U$91 U$110 U$129 U$148 = ARTIC_R2_Module

## Nets
3.3V: JP2.2 U$3.14
3.3V1: JP4.2 U$34.14
3.3V2: JP6.2 U$53.14
3.3V3: JP8.2 U$72.14
3.3V4: JP10.2 U$91.14
3.3V5: JP12.2 U$110.14
3.3V6: JP14.2 U$129.14
3.3V7: JP16.2 U$148.14
3.3V_OUT: JP1.1 R9.2 U$3.17
3.3V_OUT1: JP3.1 R1.2 U$34.17
3.3V_OUT2: JP5.1 R3.2 U$53.17
3.3V_OUT3: JP7.1 R5.2 U$72.17
3.3V_OUT4: JP9.1 R7.2 U$91.17
3.3V_OUT5: JP11.1 R11.2 U$110.17
3.3V_OUT6: JP13.1 R13.2 U$129.17
3.3V_OUT7: JP15.1 R15.2 U$148.17
ANTENNA: E1.SIG U$3.23
ANTENNA1: E2.SIG U$34.23
ANTENNA2: E3.SIG U$53.23
ANTENNA3: E4.SIG U$72.23
ANTENNA4: E5.SIG U$91.23
ANTENNA5: E6.SIG U$110.23
ANTENNA6: E7.SIG U$129.23
ANTENNA7: E8.SIG U$148.23
BOOT: J1.4 U$3.3
BOOT1: J8.4 U$34.3
BOOT2: J12.4 U$53.3
BOOT3: J16.4 U$72.3
BOOT4: J20.4 U$91.3
BOOT5: J24.4 U$110.3
BOOT6: J28.4 U$129.3
BOOT7: J32.4 U$148.3
CIPO: J3.4 U$3.10
CIPO1: J5.4 U$34.10
CIPO2: J9.4 U$53.10
CIPO3: J13.4 U$72.10
CIPO4: J17.4 U$91.10
CIPO5: J21.4 U$110.10
CIPO6: J25.4 U$129.10
CIPO7: J29.4 U$148.10
COPI: J3.5 U$3.9
COPI1: J5.5 U$34.9
COPI2: J9.5 U$53.9
COPI3: J13.5 U$72.9
COPI4: J17.5 U$91.9
COPI5: J21.5 U$110.9
COPI6: J25.5 U$129.9
COPI7: J29.5 U$148.9
CS: J3.7 U$3.7
CS1: J5.7 U$34.7
CS2: J9.7 U$53.7
CS3: J13.7 U$72.7
CS4: J17.7 U$91.7
CS5: J21.7 U$110.7
CS6: J25.7 U$129.7
CS7: J29.7 U$148.7
EN: J2.5 U8.3
EN1: J7.5 U1.3
EN2: J11.5 U2.3
EN3: J15.5 U3.3
EN4: J19.5 U4.3
EN5: J23.5 U5.3
EN6: J27.5 U6.3
EN7: J31.5 U7.3
FLASH_PWR: JP1.2 U$3.16
FLASH_PWR1: JP3.2 U$34.16
FLASH_PWR2: JP5.2 U$53.16
FLASH_PWR3: JP7.2 U$72.16
FLASH_PWR4: JP9.2 U$91.16
FLASH_PWR5: JP11.2 U$110.16
FLASH_PWR6: JP13.2 U$129.16
FLASH_PWR7: JP15.2 U$148.16
G1: J8.3 U$34.1
G2: J12.3 U$53.1
G3: J16.3 U$72.1
G4: J20.3 U$91.1
G5: J24.3 U$110.1
G6: J28.3 U$129.1
G7: J32.3 U$148.1
G8: J1.3 U$3.1
GND: C47.2 D4.C E1.GND@0 E1.GND@1 J4.5 R10.1 U8.2 U$3.12 U$3.13 U$3.22 U$3.24
GND1: C1.2 D1.C E2.GND@0 E2.GND@1 J6.5 R2.1 U1.2 U$34.12 U$34.13 U$34.22 U$34.24
GND2: C2.2 D3.C E3.GND@0 E3.GND@1 J10.5 R4.1 U2.2 U$53.12 U$53.13 U$53.22 U$53.24
GND3: C3.2 D7.C E4.GND@0 E4.GND@1 J14.5 R6.1 U3.2 U$72.12 U$72.13 U$72.22 U$72.24
GND4: C4.2 D9.C E5.GND@0 E5.GND@1 J18.5 R8.1 U4.2 U$91.12 U$91.13 U$91.22 U$91.24
GND5: C5.2 D11.C E6.GND@0 E6.GND@1 J22.5 R12.1 U5.2 U$110.12 U$110.13 U$110.22 U$110.24
GND6: C6.2 D13.C E7.GND@0 E7.GND@1 J26.5 R14.1 U6.2 U$129.12 U$129.13 U$129.22 U$129.24
GND7: C7.2 D15.C E8.GND@0 E8.GND@1 J30.5 R16.1 U7.2 U$148.12 U$148.13 U$148.22 U$148.24
INT1: J1.5 U$3.4
INT2: J1.6 U$3.5
INT3: J8.6 U$34.5
INT4: J8.5 U$34.4
INT5: J12.6 U$53.5
INT6: J12.5 U$53.4
INT7: J16.6 U$72.5
INT8: J16.5 U$72.4
INT9: J20.6 U$91.5
INT10: J20.5 U$91.4
INT11: J24.6 U$110.5
INT12: J24.5 U$110.4
INT13: J28.6 U$129.5
INT14: J28.5 U$129.4
INT15: J32.6 U$148.5
INT16: J32.5 U$148.4
N$1: D1.A R1.1
N$2: D3.A R3.1
N$3: D7.A R5.1
N$4: D9.A R7.1
N$5: D11.A R11.1
N$6: D13.A R13.1
N$7: D15.A R15.1
N$22: D4.A R9.1
PWR_EN: J2.2 U$3.15
PWR_EN1: J7.2 U$34.15
PWR_EN2: J11.2 U$53.15
PWR_EN3: J15.2 U$72.15
PWR_EN4: J19.2 U$91.15
PWR_EN5: J23.2 U$110.15
PWR_EN6: J27.2 U$129.15
PWR_EN7: J31.2 U$148.15
RESETB: J2.1 U$3.6
RESETB1: J7.1 U$34.6
RESETB2: J11.1 U$53.6
RESETB3: J15.1 U$72.6
RESETB4: J19.1 U$91.6
RESETB5: J23.1 U$110.6
RESETB6: J27.1 U$129.6
RESETB7: J31.1 U$148.6
SCLK: J3.6 U$3.8
SCLK1: J5.6 U$34.8
SCLK2: J9.6 U$53.8
SCLK3: J13.6 U$72.8
SCLK4: J17.6 U$91.8
SCLK5: J21.6 U$110.8
SCLK6: J25.6 U$129.8
SCLK7: J29.6 U$148.8
V_BATT: J2.6 Q1.3
V_BATT1: J7.6 Q2.3
V_BATT2: J11.6 Q3.3
V_BATT3: J15.6 Q4.3
V_BATT4: J19.6 Q5.3
V_BATT5: J23.6 Q6.3
V_BATT6: J27.6 Q7.3
V_BATT7: J31.6 Q8.3
V_USB: D5.A J2.4 Q1.1 R10.2
V_USB1: D2.A J7.4 Q2.1 R2.2
V_USB2: D6.A J11.4 Q3.1 R4.2
V_USB3: D8.A J15.4 Q4.1 R6.2
V_USB4: D10.A J19.4 Q5.1 R8.2
V_USB5: D12.A J23.4 Q6.1 R12.2
V_USB6: D14.A J27.4 Q7.1 R14.2
V_USB7: D16.A J31.4 Q8.1 R16.2
VCC_1: C47.1 JP2.3 U8.5
VCC_2: J4.7 JP2.1
VCC_3: C1.1 JP4.3 U1.5
VCC_4: J6.7 JP4.1
VCC_5: C2.1 JP6.3 U2.5
VCC_6: J10.7 JP6.1
VCC_7: C3.1 JP8.3 U3.5
VCC_8: J14.7 JP8.1
VCC_9: C4.1 JP10.3 U4.5
VCC_10: J18.7 JP10.1
VCC_11: C5.1 JP12.3 U5.5
VCC_12: J22.7 JP12.1
VCC_13: C6.1 JP14.3 U6.5
VCC_14: J26.7 JP14.1
VCC_15: C7.1 JP16.3 U7.5
VCC_16: J30.7 JP16.1
VIN: D5.C Q1.2 U8.1
VIN1: D2.C Q2.2 U1.1
VIN2: D6.C Q3.2 U2.1
VIN3: D8.C Q4.2 U3.1
VIN4: D10.C Q5.2 U4.1
VIN5: D12.C Q6.2 U5.1
VIN6: D14.C Q7.2 U6.1
VIN7: D16.C Q8.2 U7.1